# EAGLE board KeepUntil-v1.0.1_old (EAGLE 7.5.0)
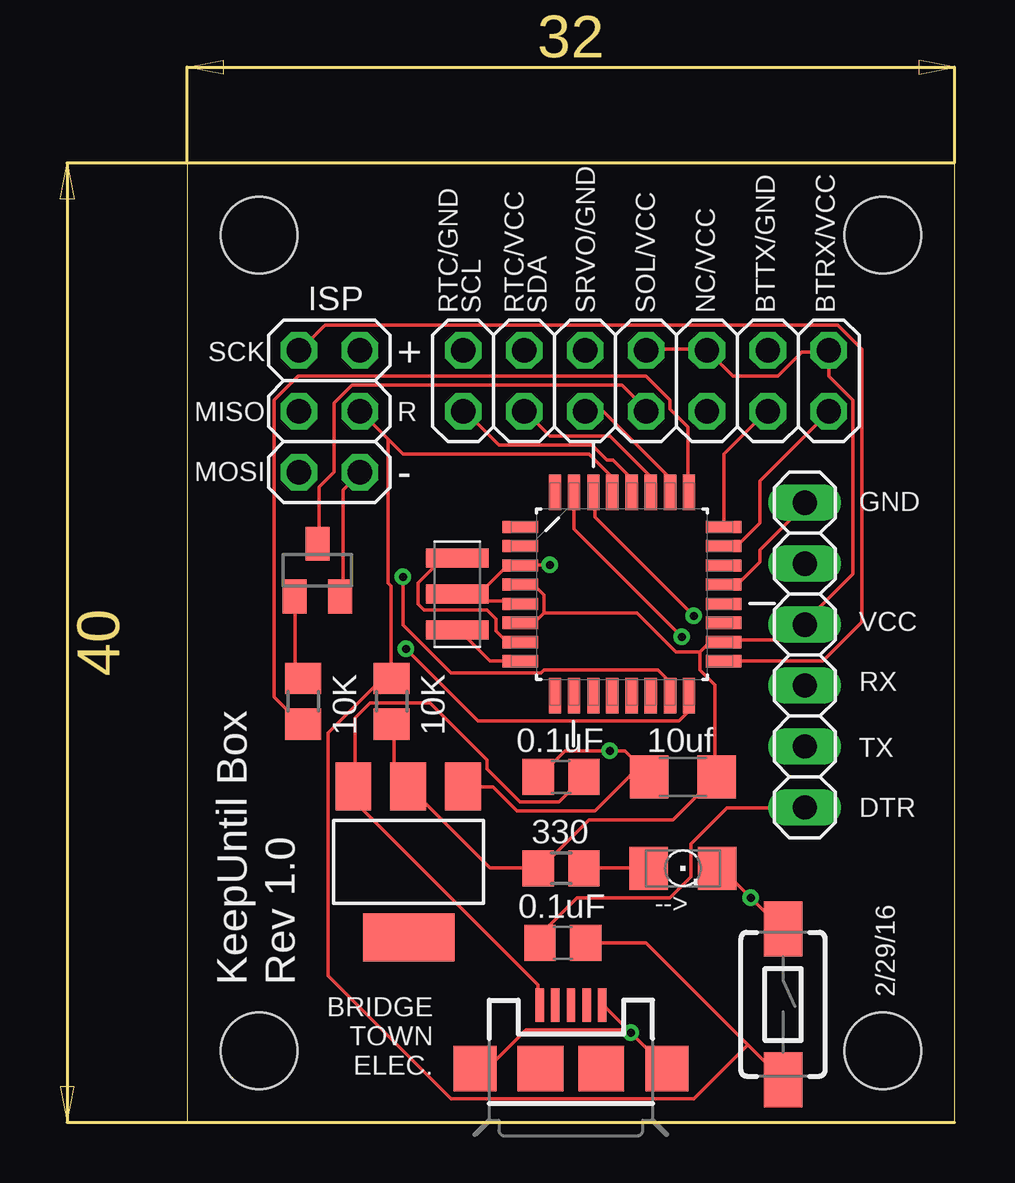
[diagram p0: board, top side]
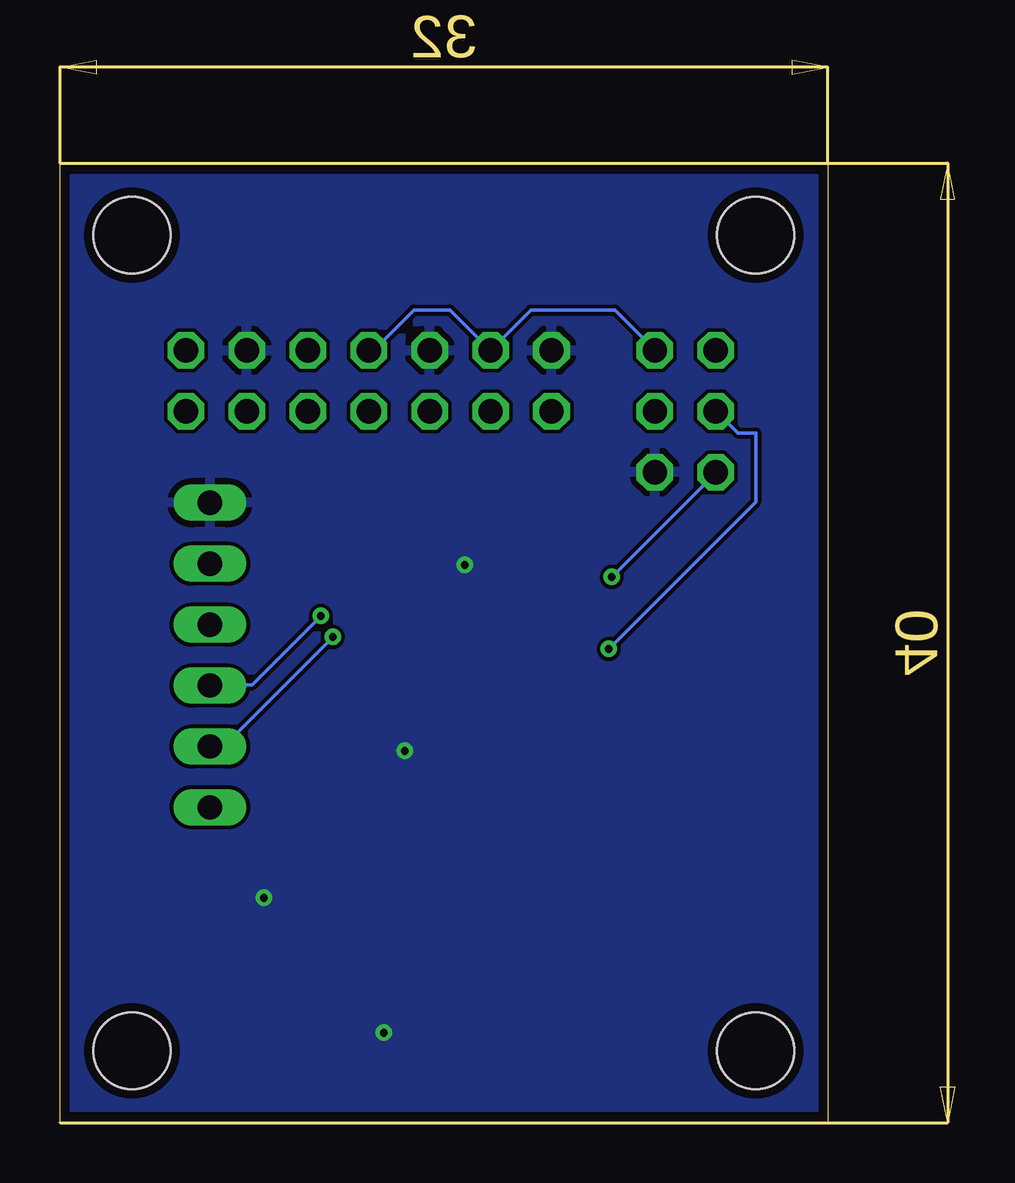
[diagram p1: board, bottom side, seen from below]

Size 32 x 40 mm. Coordinates in mm from the lower left corner, seen from the top.
Outline: 0,0 32,0 32,40 0,40 0,0
Copper layers (1*16): Top 0.0356mm / dielectric 1.5011mm / Bottom 0.0356mm
Design rules "oshpark-2layer": minimum track width 6mil, minimum drill 13mil, track to track 6mil, track to pad 6mil, pad to pad 6mil, via to via 6mil, smd to smd 6mil, copper to edge 15mil, drill to drill 6mil, minimum pad ring 7mil, minimum via ring 7mil, stop-mask expansion 2.5mil, vias tented up to drill 0mil, thermal gap 10mil
Holes 3.2 mm at 3,37 3,3 29,37 29,3 -18,22 -33,10

## Footprints (pad centres in the part's own frame; a part is rotated, then mirrored left to right if it is on the bottom)
C0805 = smd 1.3 x 1.5: 1 -0.95,0; 2 0.95,0
C1206 = smd 1.6 x 1.8: 1 -1.4,0; 2 1.4,0
SOT223 = smd 1.499 x 2.007: 1 -2.261,-3.15; 2 0.025,-3.15; 3 2.311,-3.15 | smd 3.81 x 2.007: 4 0,3.15
2X03 = drill 1.016 octagon: 1 -2.54,-1.27; 2 -2.54,1.27; 3 0,-1.27; 4 0,1.27; 5 2.54,-1.27; 6 2.54,1.27
USB-MICROB = smd 0.35 x 1.4: D+ 0,2.65; D- -0.65,2.65; GND 1.3,2.65; ID 0.65,2.65; VBUS -1.3,2.65 | smd 1.8 x 1.9: MT1 -4,0; MT2 4,0 | smd 1.9 x 1.9: P$1 -1.27,0; P$2 1.27,0
2X07 = drill 1.016 octagon: 1 -7.62,-1.27; 2 -7.62,1.27; 3 -5.08,-1.27; 4 -5.08,1.27; 5 -2.54,-1.27; 6 -2.54,1.27; 7 0,-1.27; 8 0,1.27; 9 2.54,-1.27; 10 2.54,1.27; 11 5.08,-1.27; 12 5.08,1.27; 13 7.62,-1.27; 14 7.62,1.27
1206 = smd 1.6 x 1.803: A -1.422,0; C 1.422,0
CSTCR6M = smd 0.8 x 2.6: 1 -1.5,0; 2 0,0; 3 1.5,0
R0805 = smd 1.3 x 1.5: 1 -0.95,0; 2 0.95,0
TACTILE-SWITCH-1101NE = smd 2.3 x 1.6: 1 -3.15,0; 2 3.15,0
1X06 = drill 1.016 long: 1 -6.35,0; 2 -3.81,0; 3 -1.27,0; 4 1.27,0; 5 3.81,0; 6 6.35,0
SOT23 = smd 1 x 1.4: 1 -0.95,-1.1; 2 0.95,-1.1; 3 0,1.1
QFP80P900X900X120-32N = smd 1.473 x 0.508: 1 -4.242,2.794; 2 -4.242,2.007; 3 -4.242,1.194; 4 -4.242,0.406; 5 -4.242,-0.406; 6 -4.242,-1.194; 7 -4.242,-2.007; 8 -4.242,-2.794; 17 4.242,-2.794; 18 4.242,-2.007; 19 4.242,-1.194; 20 4.242,-0.406; 21 4.242,0.406; 22 4.242,1.194; 23 4.242,2.007; 24 4.242,2.794 | smd 0.508 x 1.473: 9 -2.794,-4.242; 10 -2.007,-4.242; 11 -1.194,-4.242; 12 -0.406,-4.242; 13 0.406,-4.242; 14 1.194,-4.242; 15 2.007,-4.242; 16 2.794,-4.242; 25 2.794,4.242; 26 2.007,4.242; 27 1.194,4.242; 28 0.406,4.242; 29 -0.406,4.242; 30 -1.194,4.242; 31 -2.007,4.242; 32 -2.794,4.242

## Placement (x,y rotation side)
C1  0.1uF  [C0805]  15.66,7.5 180 top
C2  10uf  [C1206]  20.67,14.41 180 top
C4  0.1uF  [C0805]  15.59,14.41 180 top
IC2  REG1117  [SOT223]  9.24,10.88 180 top
ISP  [2X03]  5.93,29.66 270 top
J1  USB-MICROB  [USB-MICROB]  16,2.25 0 top
JP1  [2X07]  19.13,30.93 180 top
LED1  [1206]  20.67,10.61 0 top
Q1  CSTCR6M00G53Z  [CSTCR6M]  11.26,22.04 270 top
R1  10K  [R0805]  8.53,17.57 270 top
R2  10K  [R0805]  4.84,17.57 270 top
R7  330  [R0805]  15.59,10.61 180 top
S1  SWITCH-MOMENTARY-2SMD-1101NE  [TACTILE-SWITCH-1101NE]  24.84,4.93 270 top
SERIAL  [1X06]  25.75,19.5 270 top
T1  BC846  [SOT23]  5.43,23.04 0 top
U1  ATMEGA328P-AU  [QFP80P900X900X120-32N]  18.13,22.04 0 top

## Library data of the parts
C1 C2 C4 R1 R2 R7 = resistor
IC2 = burr-brown; MPN: LM1117 3v3; OC_FARNELL: 1097566; OC_NEWARK: 14P6981
ISP JP1 SERIAL = pinhead
J1 = SparkFun-Connectors; PROD_ID: CONN-09505
LED1 = led
Q1 = murata-filter; MPN: CSTCR6M00G53-R0; OC_FARNELL: 1170434; OC_NEWARK: 25M8759
S1 = SparkFun-Electromechanical; PROD_ID: SWCH-00815
T1 = transistor
U1 = Ava; DESCRIPTION: 8-bit Microcontroller with In-System Programmable Flash; MPN: ATMEGA328P-AU; OC_FARNELL: 1715486; OC_NEWARK: 14R4631; PACKAGE: TQFP-32; SUPPLIER: Atmel

## Nets
BT-RX: JP1.2 U1.23
BT-TX: JP1.4 U1.24
GND: C2.2 C4.2 IC2.1 ISP.6 J1.GND J1.MT1 J1.MT2 JP1.3 JP1.9 JP1.13 LED1.C Q1.2 S1.1 SERIAL.1 T1.2 U1.3 U1.5 U1.21
MISO: ISP.3 U1.16
MOSI: ISP.5 U1.15
N$1: Q1.1 U1.7
N$2: Q1.3 U1.8
N$3: R2.1 T1.1
N$4: C4.1 IC2.3 J1.VBUS
N$7: LED1.A R7.1
N$17: C1.2 SERIAL.6
RESET: C1.1 ISP.4 R1.1 S1.2 U1.29
RTC-SCL: JP1.14 U1.28
RTC-SDA: JP1.12 U1.27
RX: SERIAL.4 U1.30
SCK: ISP.1 U1.17
SERVO: JP1.10 U1.26
SOLENOID: JP1.8 T1.3
SOLENOID-SIG: R2.2 U1.25
TX: SERIAL.5 U1.31
VCC: C2.1 IC2.2 ISP.2 JP1.1 JP1.5 JP1.7 JP1.11 R1.2 R7.2 SERIAL.3 U1.4 U1.6 U1.18

## Tracks (layer width: path | path; a pad name or v marks a point on that pad's centre or on a via)
BT-RX
  Top 0.152: U1.23 22.38,24.12 23,24.12 23.88,25 23.88,26.75 26.75,29.62 JP1.2
BT-TX
  Top 0.152: U1.24 22.38,24.88 22.38,27.88 24.12,29.62 JP1.4
GND  (via drill 0.33)
  Top 0.152: 18.38,3.88 v18.5,3.75 J1.MT2 | 18.38,3.88 17.38,4.88 J1.GND | 18.38,3.88 14.12,3.88 12.62,2.38 12,2.38 J1.MT1 | 18.88,14.88 19.25,14.5 C2.2 18.88,14.88 | 18.88,14.88 18.25,15.5 v17.62,15.5 15.75,15.5 14.75,14.5 C4.2 | 18.88,14.88 17,13 13.75,13 12.75,14 11.62,14 IC2.1 | LED1.C 22.12,10.5 22.38,10.5 v23.5,9.38 24.75,8.12 S1.1 | 11.88,21.75 11.62,21.75 11.38,22 Q1.2 11.88,21.75 | 11.88,21.75 13.88,21.75 U1.5 | 11.88,21.75 13.25,23.12 13.88,23.12 U1.3 14,23.25 v15.12,23.25 | T1.2 6.5,22 6.5,26.38 7.12,27 ISP.6 | U1.21 22.38,22.5 23,22.5 23.88,23.38 23.88,23.88 25.75,25.75 SERIAL.1
  pour Bottom: 0,0 32,0 32,40 0,40
MISO  (via drill 0.33)
  Top 0.152: v9.12,19.75 12.12,16.75 20.5,16.75 20.88,17.12 20.88,17.75 U1.16
  Bottom 0.152: v9.12,19.75 3,25.88 3,28.75 3.75,28.75 4.62,29.62 ISP.3
MOSI  (via drill 0.33)
  Top 0.152: v9,22.75 9,20.75 11,18.75 14.75,18.75 14.88,18.88 19.62,18.88 20.12,18.38 20.12,17.88 U1.15
  Bottom 0.152: v9,22.75 4.75,27 ISP.5
N$1
  Top 0.152: U1.7 13.88,20.12 13.25,20.12 12.88,20.5 12.88,21 12.5,21.38 9.88,21.38 9.62,21.62 9.62,22.5 10.62,23.5 11.25,23.5 Q1.1
N$2
  Top 0.152: U1.8 13.88,19.25 12.62,19.25 11.38,20.5 Q1.3
N$3
  Top 0.152: T1.1 4.5,21.88 4.5,18.88 4.75,18.62 R2.1
N$4
  Top 0.152: J1.VBUS 14.62,5 14.62,5.75 7,13.38 7,14 IC2.3 7,14.12 7,16.88 7.62,17.5 10.12,17.5 12.5,15.12 12.5,14.75 13.88,13.38 15.5,13.38 C4.1
N$7
  Top 0.152: R7.1 16.62,10.62 19.12,10.62 LED1.A
N$17
  Top 0.152: C1.2 14.75,7.5 14.75,7.88 16.25,9.38 20.12,9.38 21,10.25 21,11.62 22.5,13.12 25.75,13.12 SERIAL.6
RESET
  Top 0.152: C1.1 19.12,7.5 23.38,3.25 | S1.2 23.38,3.25 | 8.38,28.5 7.25,29.62 ISP.4 | 8.38,28.5 9,27.88 16.75,27.88 17.62,27 17.62,26.38 U1.29 | 8.5,18.88 8.5,22.38 8.38,22.5 8.38,28.5 | 8.5,18.88 8.5,18.62 R1.1 8.5,18.88 | 23.38,3.25 21.12,1 11,1 5.88,6.12 5.88,16.25 8.5,18.88
RTC-SCL
  Top 0.152: U1.28 18.5,26.38 18.5,26.88 17.75,27.62 17.5,27.62 16.88,28.25 13,28.25 11.62,29.62 JP1.14
RTC-SDA
  Top 0.152: U1.27 19.25,26.38 19.25,27 17.62,28.62 15.12,28.62 14.12,29.62 JP1.12
RX  (via drill 0.33)
  Top 0.152: v21.12,21.12 17,25.25 17,26.25 U1.30
  Bottom 0.152: v21.12,21.12 24,18.25 25.75,18.25 SERIAL.4
SCK
  Top 0.152: U1.17 26.5,19.25 28.12,20.88 28.12,32.25 27.12,33.25 5.75,33.25 4.75,32.25 ISP.1
SERVO
  Top 0.152: U1.26 20.12,26.38 20.12,26.88 17.38,29.62 16.62,29.62 JP1.10
SOLENOID
  Top 0.152: T1.3 5.5,24.25 5.5,26.5 6.12,27.12 6.12,30 6.88,30.75 18.12,30.75 19.12,29.75 JP1.8
SOLENOID-SIG
  Top 0.152: U1.25 20.88,26.38 20.88,29 20.12,29.75 20.12,30.12 19.12,31.12 4.62,31.12 3.62,30.12 3.62,17.75 4.75,16.62 R2.2
TX  (via drill 0.33)
  Top 0.152: v20.62,20.25 16.12,24.75 16.12,26.25 U1.31
  Bottom 0.152: v20.62,20.25 25.12,15.75 25.75,15.75 SERIAL.5
VCC
  Top 0.152: JP1.7 19.25,32.25 21.62,32.25 JP1.5 21.75,32.12 22.75,31.12 24.62,31.12 25.62,32.12 26.75,32.12 | R1.2 8.62,16.5 8.62,14.62 9.12,14.12 IC2.2 9.25,14 12.62,10.62 14.62,10.62 R7.2 14.75,10.62 16.75,12.62 20.25,12.62 22,14.38 C2.1 22,14.5 22,18.25 21.38,18.88 21.38,19.62 | 14.88,21.25 14.5,20.88 14,20.88 U1.6 | 14.88,21.25 14.88,22 14.5,22.38 14,22.38 U1.4 | 21.38,19.62 21.75,20 22.25,20 U1.18 22.38,20.12 25.12,20.12 25.75,20.75 SERIAL.3 25.75,20.88 27.75,22.88 27.75,30.12 26.75,31.12 26.75,32.12 | 14.88,21.25 18.75,21.25 20.38,19.62 21.38,19.62 | 26.75,32.12 JP1.1
  Bottom 0.152: ISP.2 7.25,32.25 8.88,33.88 12.38,33.88 14,32.25 JP1.11 14.12,32.25 15.75,33.88 17.25,33.88 18.88,32.25 19.12,32.25 JP1.7

## Text on the board
tPlace: RTC/GND / SCL | RTC/VCC / SDA | SRVO/GND | SOL/VCC | NC/VCC | BTTX/GND | BTRX/VCC | SCK | + | MISO | R | Rev 1.0 | MOSI | March 3, 2016 | - | GND | KeepUntil Box | VCC | RX | TX | BRIDGE TOWN | ELECTRONICS | DTR | --> | KeepUntil Box | Rev 1.0 | 2/29/16 | BRIDGE / TOWN / ELEC.